# Altium PCB PCB1.PcbDoc
Units mil, origin at the board's own origin, x right, y up, seen from the top; angles counter-clockwise.
Board outline 2810 x 4080 mil, 2 copper layers (Top Layer, Bottom Layer); 54 components, 51 nets, 344 pads, 53 vias.
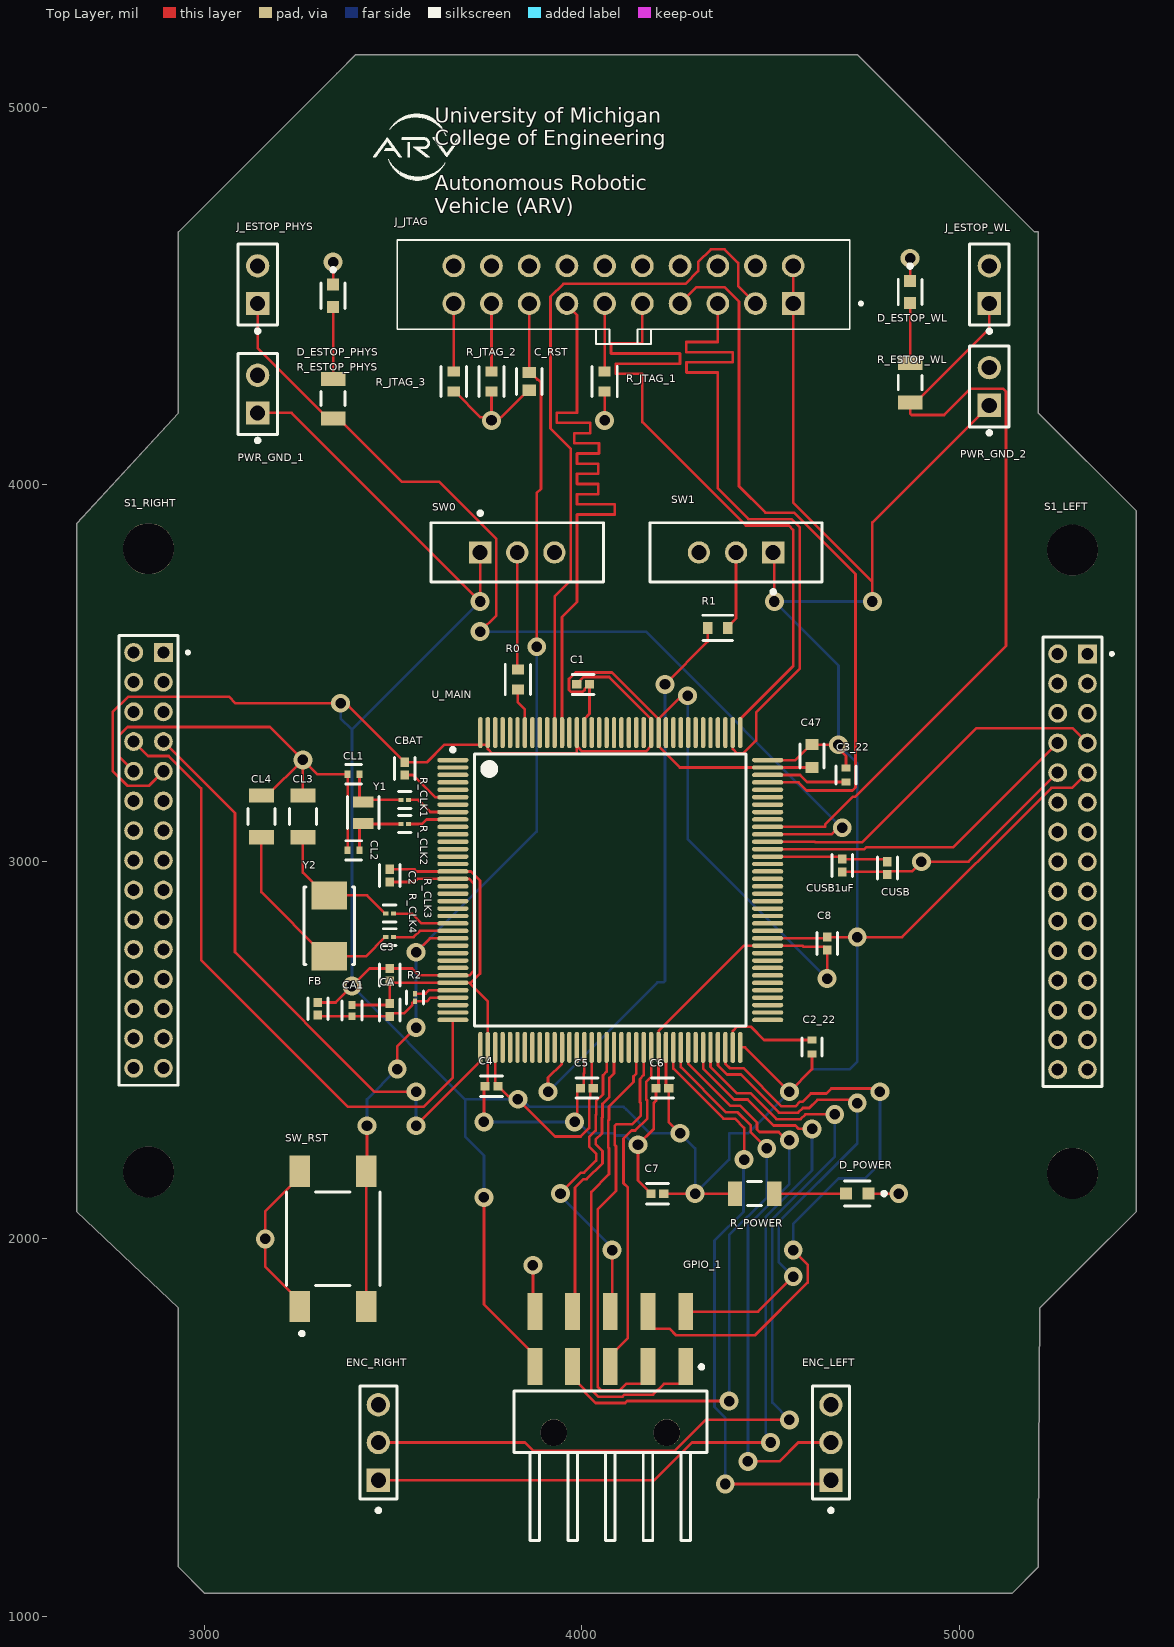
[diagram p0: Top Layer view]
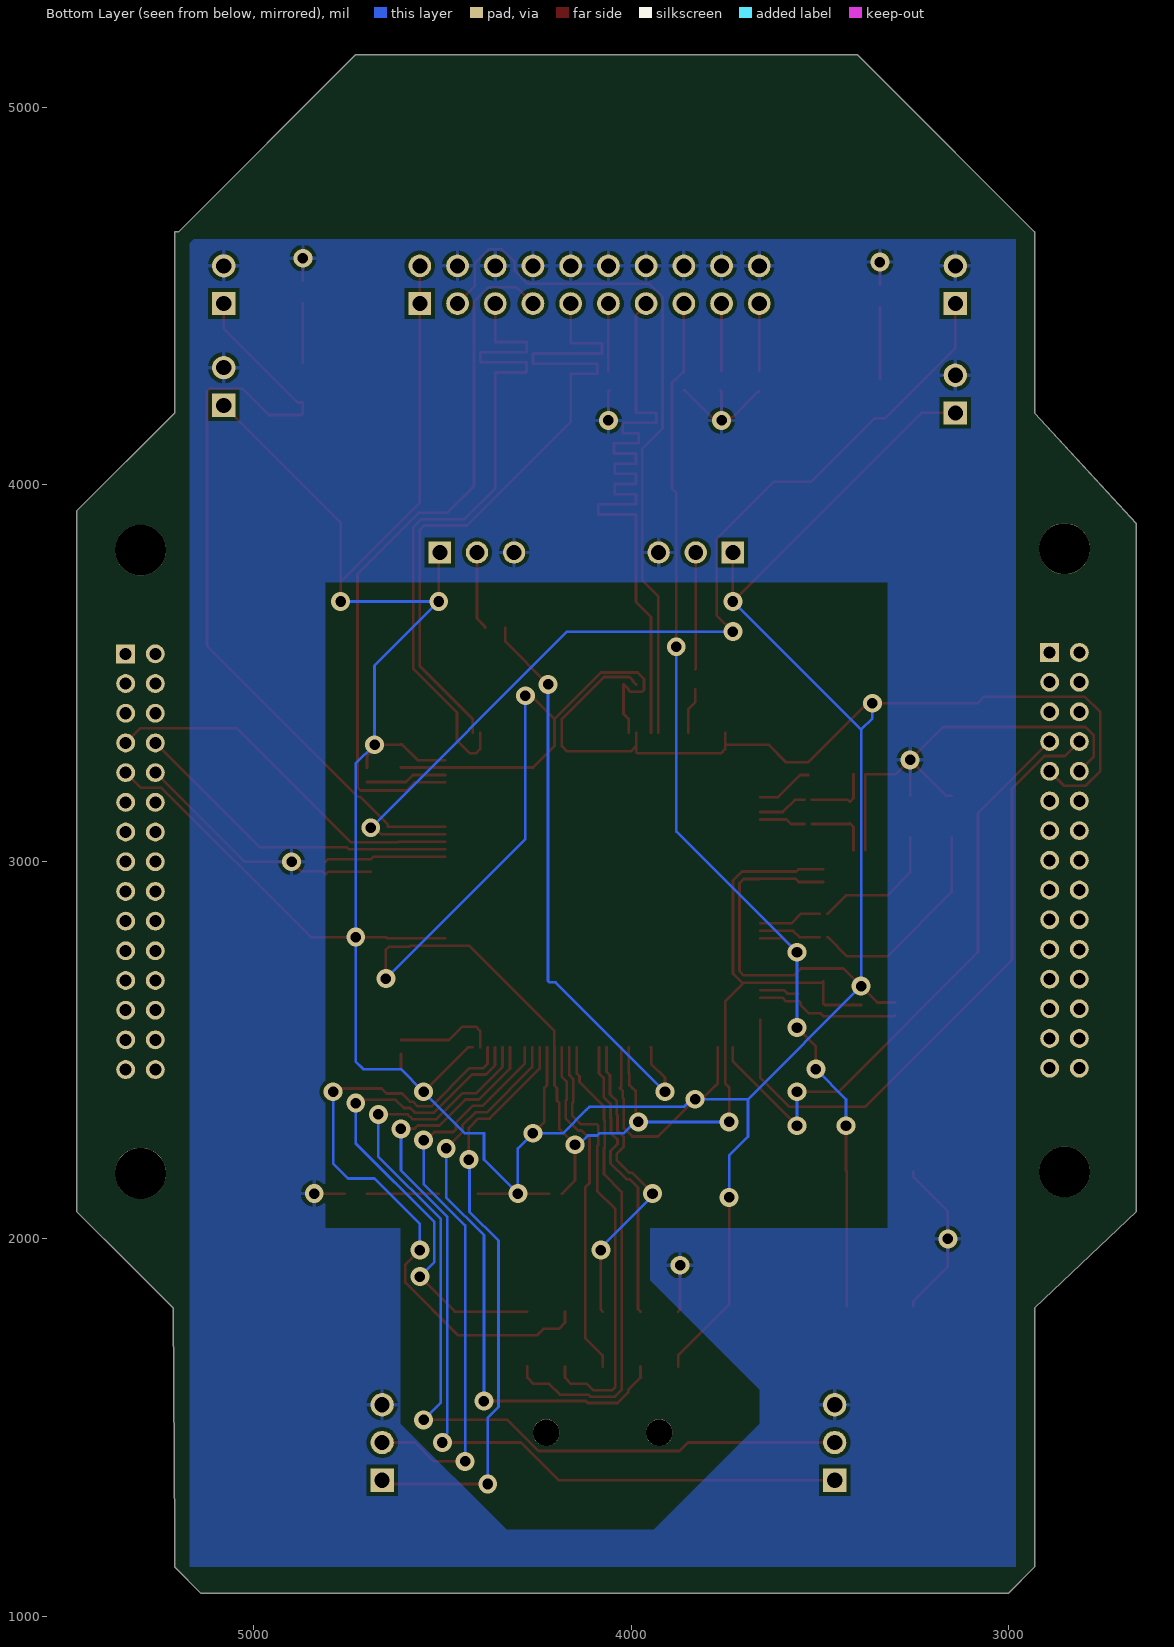
[diagram p1: Bottom Layer view, seen from below]
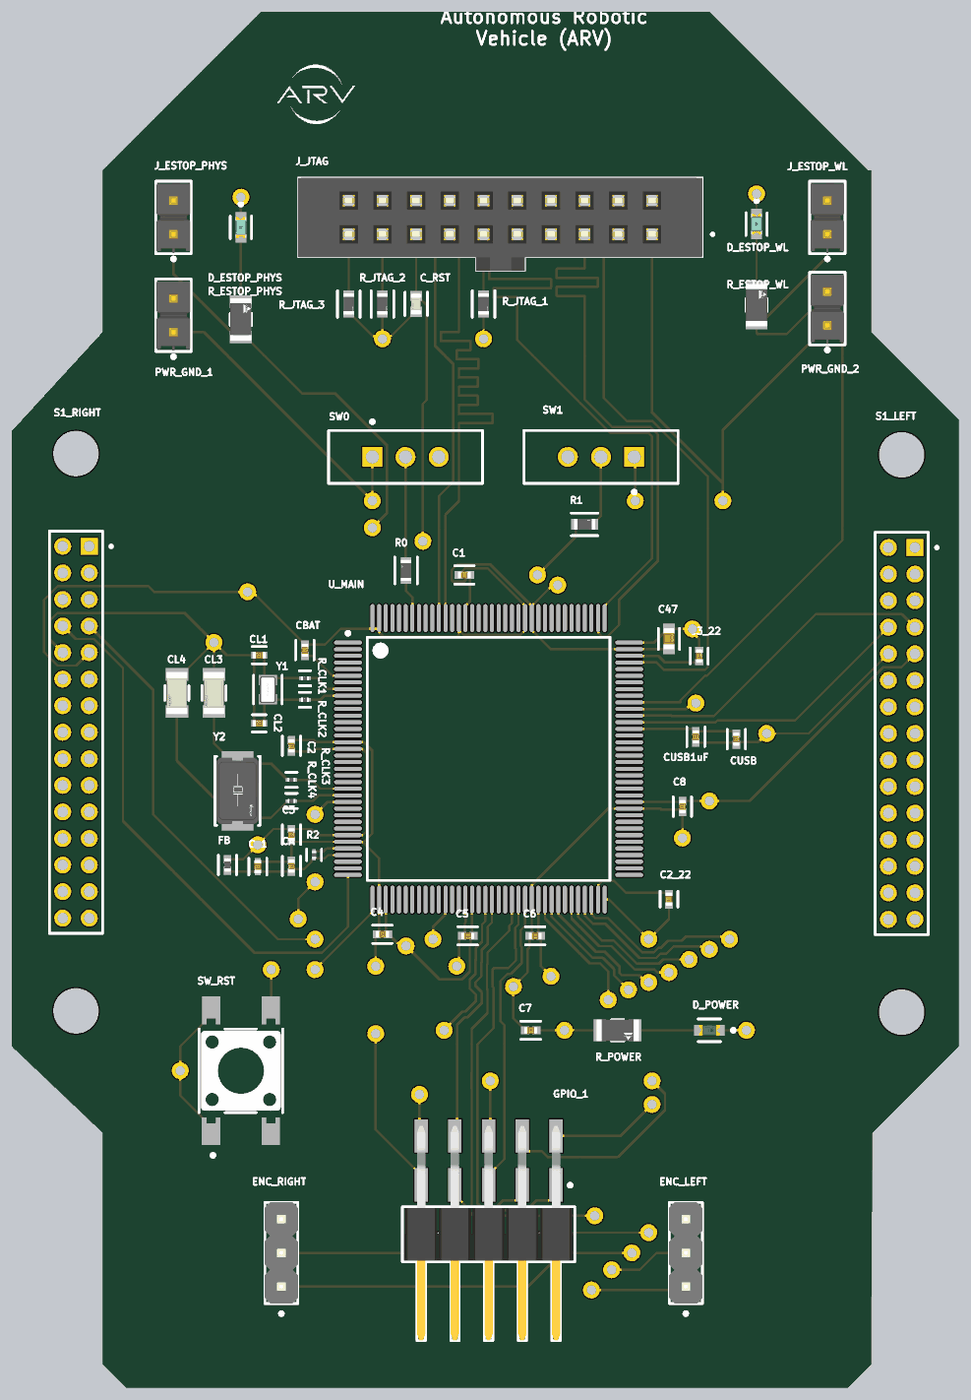
[diagram p2: 3D render of the assembled board from above, using the file's embedded part models]

## Layer stack, top to bottom
Top Solder: solder mask 0.4, Solder Resist, Dk 3.5
Top Layer: signal copper 1.4
Dielectric 1: dielectric 12.6, FR-4, Dk 4.8
Bottom Layer: signal copper 1.4
Bottom Solder: solder mask 0.4, Solder Resist, Dk 3.5

## Board outline
3350,5090 2930,4670 2930,4190 2660,3896.09 2660,2072.88 2930,1816.44 2930,1130 3000,1060 5140,1060 5210,1130 5210,1210 5213.56,1816.44 5325,1927.88 5470,2072.88 5470,3930 5210,4190 5210,4670 5200,4670 4730,5140 3400,5140

## Design rules (kind name [scope] priority, off if disabled: settings)
Clearance [All] p1: gap=5 ignorepadtopadclearanceinfootprint=FALSE except(0: Arc-Hole Track-Hole SMDPad-Hole THPad-Hole Via-Hole Fill-Hole Poly-Hole Region-Hole Text-Hole)
HoleSize [All] p1: absolutevalues=TRUE maxlimit=140 minlimit=1 maxpercent=80.000 minpercent=20.000
PolygonConnect [All] p1: connectstyle=Relief reliefconductorwidth=10 reliefentries=4 polygonreliefangle="90 Angle" airgapwidth=10
RoutingVias [All] p1: holewidth=28 width=50 viastyle="Through Hole" minholewidth=28 minwidth=50 maxholewidth=28 maxwidth=50
SolderMaskExpansion [All] p1: expansion=4 istentingtop=FALSE
Width [All] p1: maxlimit=10 minlimit=5 preferedwidth=7
29 further rules are at their usual default settings.

## Classes and differential pairs
component class U_UartCircuit: S1_LEFT S1_RIGHT
component class U_ResetCircuit: C_RST SW_RST
component class U_PowerCircuit: C1 C2 C2_22 C3 C3_22 C4 C5 C6 C7 C8 C47 CA CA1 CBAT CUSB CUSB1uF D_POWER FB R2 R_POWER
component class U_PeripheralCircuit: D_ESTOP_PHYS D_ESTOP_WL ENC_LEFT ENC_RIGHT GPIO_1 J_ESTOP_PHYS J_ESTOP_WL PWR_GND_1 PWR_GND_2 R_ESTOP_PHYS R_ESTOP_WL
component class U_DebugCircuit: J_JTAG R_JTAG_1 R_JTAG_2 R_JTAG_3
component class U_ClockCircuit: CL1 CL2 CL3 CL4 R_CLK1 R_CLK2 R_CLK3 R_CLK4 Y1 Y2
component class U_BootCircuit: R0 R1 SW0 SW1
component class STM32: U_MAIN

## Components (designator, comment, footprint, x,y, rotation, side; value= is the part's Value field where it differs from the comment)
C1 "GCM155L81E104KE02D" FP-GCM155-0_05-IPC_B 4003.13,3470 r180 top
C2 "GCM155L81E104KE02D" FP-GCM155-0_05-IPC_B 3490,2963.13 r270 top
C2_22 "GRM155R61E225ME15D" FP-GRM155-0_2-0_05-MFG 4610,2508.7 r270 top
C3 "GCM155L81E104KE02D" FP-GCM155-0_05-IPC_B 3490,2700 r90 top
C3_22 "GRM155R61E225ME15D" FP-GRM155-0_2-0_05-MFG 4700,3230 r90 top
C4 "GCM155L81E104KE02D" FP-GCM155-0_05-IPC_B 3760,2404.71 r0 top
C5 "GCM155L81E104KE02D" FP-GCM155-0_05-IPC_B 4013.13,2400 r0 top
C6 "GCM155L81E104KE02D" FP-GCM155-0_05-IPC_B 4213.13,2400 r0 top
C7 "GCM155L81E104KE02D" FP-GCM155-0_05-IPC_B 4200,2120 r0 top
C8 "GCM155L81E104KE02D" FP-GCM155-0_05-IPC_B 4650,2783.13 r90 top
C47 "GRM188R61C475KE11D" FP-GRM188-0_15-MFG 4610,3280.51 r90 top
C_RST "C0603C103K1RACTU" FP-C0603C-CF-MFG 3860,4273.62 r90 top value="10,000 pF"
CA "GCM155L81E104KE02D" FP-GCM155-0_05-IPC_B 3490,2606.87 r270 top
CA1 "GRM155R61C105KA12D" FP-GRM155-0_05-IPC_C 3390,2605.1 r270 top
CBAT "GCM155L81E104KE02D" FP-GCM155-0_05-IPC_B 3530,3246.87 r90 top
CL1 "GCM1555C1H6R8BA16D" FP-GCM155-0_05-MFG 3394.25,3232.18 r180 top
CL2 "GCM1555C1H6R8BA16D" FP-GCM155-0_05-MFG 3394.25,3030 r180 top
CL3 "C1206C180J5GACTU" FP-C1206C-EB-MFG 3260,3120 r90 top value="18 pF"
CL4 "C1206C180J5GACTU" FP-C1206C-EB-MFG 3150,3120 r90 top value="18 pF"
CUSB "GCM155L81E104KE02D" FP-GCM155-0_05-IPC_B 4810,2983.13 r90 top
CUSB1uF "GCM155L81E104KE02D" FP-GCM155-0_05-IPC_B 4690,2990 r90 top
D_ESTOP_PHYS "LTST-C191TBKT" FP-LTST-C191TBKT-MFG 3340,4500.47 r270 top
D_ESTOP_WL "LTST-C191TBKT" FP-LTST-C191TBKT-MFG 4870,4510.47 r270 top
D_POWER "LTST-C190GKT" FP-LTST-C190GKT-MFG 4730,2120 r180 top
ENC_LEFT "PR20203VBNN" FP-PR20203VBNN-MFG 4660,1460 r90 top
ENC_RIGHT "PR20203VBNN" FP-PR20203VBNN-MFG 3460,1460 r90 top
FB "BLM15AX601SN1D" FP-BLM15-0_05-IPC_B 3300,2610 r270 top
GPIO_1 "610110249121" 610110249121 4075,1515 r0 top
J_ESTOP_PHYS "TSW-102-07-L-S" FP-TSW-102-07-L-S-MFG 3140,4530 r90 top
J_ESTOP_WL "TSW-102-07-L-S" FP-TSW-102-07-L-S-MFG 5080,4530 r90 top
J_JTAG "SFH11-PBPC-D10-ST-BK" SULLINS_SFH11-PBPC-D10-ST-BK 4110,4530 r0 top
PWR_GND_1 "TSW-102-07-L-S" FP-TSW-102-07-L-S-MFG 3140,4240 r90 top
PWR_GND_2 "TSW-102-07-L-S" FP-TSW-102-07-L-S-MFG 5080,4260 r90 top
R0 "RC0603FR-0710KL" FP-RC0603-0_55-IPC_C 3830,3483.36 r90 top
R1 "RC0603FR-0710KL" FP-RC0603-0_55-IPC_C 4360,3620 r0 top
R2 "RMCF0201ZT0R00" FP-RMCF0201-IPC_C 3557.15,2640.01 r270 top
R_CLK1 "RMCF0201ZT0R00" FP-RMCF0201-IPC_C 3530.01,3163.83 r180 top
R_CLK2 "RMCF0201ZT0R00" FP-RMCF0201-IPC_C 3529.99,3100 r180 top
R_CLK3 "RMCF0201ZT0R00" FP-RMCF0201-IPC_C 3489.99,2862.37 r180 top
R_CLK4 "RMCF0201ZT0R00" FP-RMCF0201-IPC_C 3489.99,2800 r180 top
R_ESTOP_PHYS "CRCW1206220RJNEA" FP-CRCW1206-e3-IPC_C 3340,4227.79 r90 top
R_ESTOP_WL "CRCW1206220RJNEA" FP-CRCW1206-e3-IPC_C 4870,4270 r90 top
R_JTAG_1 "RC0603FR-0710KL" FP-RC0603-0_55-IPC_C 4060,4273.36 r270 top
R_JTAG_2 "RC0603FR-0710KL" FP-RC0603-0_55-IPC_C 3760,4273.36 r270 top
R_JTAG_3 "RC0603FR-0710KL" FP-RC0603-0_55-IPC_C 3660,4273.36 r270 top
R_POWER "CRCW1206220RJNEA" FP-CRCW1206-e3-IPC_C 4457.79,2120 r0 top
S1_LEFT "PTF-115-XX-X-D" SAMTEC_PTF-115-XX-X-D 5300.63,3000 r90 top (schematic designator S1_LEFT)
S1_RIGHT "PTF-115-XX-X-D" SAMTEC_PTF-115-XX-X-D 2850.63,3003.7 r90 top
SW0 "EG1218" ESWI-EG1218_V 3828.43,3820 r0 top
SW1 "EG1218" ESWI-EG1218_V 4408.43,3820 r180 top
SW_RST "FSM2JSMAA" FP-FSM2JSMAA-MFG 3340,2000 r180 top
U_MAIN "STM32F446ZET6" STM-LQFP144_M 4075,2925 r0 top
Y1 "ABS06-32.768KHZ-6-1-T" FP-ABS06-MFG 3420,3130 r270 top
Y2 "ABM3-8.000MHZ-D2Y-T" FP-ABM3-MFG 3330,2830 r270 top

## Footprints (in the part's own frame and the unit in brackets; to place one, negate y for a bottom-side part, rotate by r counter-clockwise, add the part's x,y. Pads: shape width x height; smd on the part's side, far side on the other; paste and mask are expansions set on the pad)
610110249121 [mm] "Pin Header, pitch 2.54 mm, SMD, Angled, dual row, 10p"
  rect 1x2.5 smd: 1(5.08,3.72) 2(5.08,7.42) 3(2.54,3.72) 4(2.54,7.42) 5(0,3.72) 6(0,7.42) 7(-2.54,3.72) 8(-2.54,7.42) 9(-5.08,3.72) 10(-5.08,7.42)
  round 1.8 hole 1.8 unplated: MH1(3.81,-0.73) MH2(-3.81,-0.73)
  silkscreen extent -6.5,-8 6.5,3.82, body extent -6.35,-8 6.35,8.16, height 5.1
ESWI-EG1218_V [mm] "THD, 3-Leads, Body 11.6x4mm, Pitch 2.5mm"
  rect 1.5x1.5 hole 1: 1(-2.5,0)
  round 1.5 hole 1: 2(0,0) 3(2.5,0)
  silkscreen extent -5.8,-2 5.8,2.77, body extent -5.8,-2 5.8,2, height 7.4
FP-ABM3-MFG [mm]
  rect 1.9x2.4 smd paste+0 mask+0: 1(-2.05,0) 2(2.05,0)
  silkscreen extent -2.6,-1.7 2.6,1.7, body extent -3.1,-1.8 3.1,1.8, height 0.25
FP-ABS06-MFG [mm]
  rect 0.75x1.4 smd paste+0 mask+0: 1(-0.725,0) 2(0.725,0)
  silkscreen extent -1.07,-1.07 1.07,1.07, body extent -1.2,-0.8 1.2,0.8, height 0.25
FP-BLM15-0_05-IPC_B [mil]
  rect 24.23x22.54 smd paste+0 mask+0: 1(-16.87,0) 2(16.87,0)
  silkscreen extent -29,-27 29,27, body extent -35,-17 35,17, height 10
FP-C0603C-CF-MFG [mm]
  rect 0.75x0.9 smd paste+0 mask+0: 1(-0.6,0) 2(0.6,0)
  silkscreen extent -0.87,-0.85 0.88,0.85, body extent -1.2,-0.6 1.2,0.6, height 0.25
FP-C1206C-EB-MFG [mm]
  rect 0.95x1.7 smd paste+0 mask+0: 1(-1.4,0) 2(1.4,0)
  silkscreen extent -0.55,-0.9 0.55,0.9, body extent -2,-1 2,1, height 0.25
FP-CRCW1206-e3-IPC_C [mil]
  rect 37.64x65.28 smd paste+0 mask+0: 1(-52.21,0) 2(52.21,0)
  silkscreen extent -19,-31 19,31, body extent -75,-38 75,38, height 10
FP-FSM2JSMAA-MFG [mm]
  rect 1.38x2.1 smd paste+0 mask+0: 1(2.25,4.55) 2(2.24,-4.55) 3(-2.24,4.55) 4(-2.24,-4.55)
  silkscreen extent -3.15,-3.15 3.15,6.5, body extent -3.25,-5.7 3.25,5.7, height 0.25
FP-GCM155-0_05-IPC_B [mil]
  rect 24.23x22.54 smd paste+0 mask+0: 1(-16.87,0) 2(16.87,0)
  silkscreen extent -29,-27 29,27, body extent -35,-17 35,17, height 10
FP-GCM155-0_05-MFG [mm]
  rect 0.4x0.5 smd paste+0 mask+0: 1(-0.4,0) 2(0.4,0)
  silkscreen extent -0.53,-0.65 0.53,0.65, body extent -0.7,-0.38 0.7,0.38, height 0.25
FP-GRM155-0_2-0_05-MFG [mm]
  rect 0.45x0.6 smd paste+0 mask+0: 1(-0.475,0) 2(0.475,0)
  silkscreen extent -0.61,-0.67 0.6,0.67, body extent -0.8,-0.45 0.8,0.45, height 0.25
FP-GRM155-0_05-IPC_C [mil]
  rect 20.29x18.6 smd paste+0 mask+0: 1(-14.9,0) 2(14.9,0)
  silkscreen extent -25,-27 25,27, body extent -29,-15 29,15, height 10
FP-GRM188-0_15-MFG [mm]
  rect 0.75x0.9 smd paste+0 mask+0: 1(-0.775,0) 2(0.775,0)
  silkscreen extent -0.8,-0.8 0.8,0.8, body extent -1.25,-0.58 1.25,0.58, height 0.25
FP-LTST-C190GKT-MFG [mm]
  rect 0.8x0.8 smd paste+0 mask+0: 1(-0.75,0) 2(0.75,0)
  silkscreen extent -1.92,-0.85 0.85,0.85, body extent -1.25,-0.55 1.25,0.55, height 0.25
FP-LTST-C191TBKT-MFG [mm]
  rect 0.8x0.8 smd paste+0 mask+0: 1(-0.75,0) 2(0.75,0)
  silkscreen extent -1.87,-0.8 0.85,0.8, body extent -1.25,-0.55 1.25,0.55, height 0.25
FP-PR20203VBNN-MFG [mm]
  rect 1.57x1.57 hole 1.02 paste-1000 mask+0: 1(-2.54,0)
  round 1.57 hole 1.02 paste-1000 mask+0: 2(0,0) 3(2.54,0)
  silkscreen extent -4.7,-1.25 3.81,1.25, body extent -3.91,-1.35 3.91,1.35, height 0.25
FP-RC0603-0_55-IPC_C [mil]
  rect 25.93x31.97 smd paste+0 mask+0: 1(-26.64,0) 2(26.64,0)
  silkscreen extent -40,-33 40,33, body extent -44,-22 44,22, height 10
FP-RMCF0201-IPC_C [mil]
  rect 13.94x10.34 smd paste+0 mask+0: 1(-10.01,0) 2(10.01,0)
  silkscreen extent -17,-22 17,22, body extent -21,-10 21,10, height 10
FP-TSW-102-07-L-S-MFG [mm]
  rect 1.57x1.57 hole 1.02 paste-1000 mask+0: 1(-1.27,0)
  round 1.57 hole 1.02 paste-1000 mask+0: 2(1.27,0)
  silkscreen extent -3.25,-1.34 2.73,1.34, body extent -2.83,-1.44 2.83,1.44, height 0.25
SAMTEC_PTF-115-XX-X-D [mm]
  rect 1.27x1.27 / inner round 1.27 / far side rect 1.27x1.27 hole 0.813: 01(14,-1)
  round 1.27 hole 0.813: 02(14,1) 03(12,-1) 04(12,1) 05(10,-1) 06(10,1) 07(8,-1) 08(8,1) 09(6,-1) 10(6,1) 11(4,-1) 12(4,1) 13(2,-1) 14(2,1) 15(0,-1) 16(0,1) 17(-2,-1) 18(-2,1) 19(-4,-1) 20(-4,1) 21(-6,-1) 22(-6,1) 23(-8,-1) 24(-8,1) 25(-10,-1) 26(-10,1) 27(-12,-1) 28(-12,1) 29(-14,-1) 30(-14,1)
  round 3.43 hole 3.43 unplated: ""(-20.985,0) ""(20.985,0)
  silkscreen extent -15.15,-2.75 15.15,2
STM-LQFP144_M [mm] "Thin QFP, 144-Leads, Body 20x20mm, Pitch 0.5mm, IPC Low Density"
  oval 2.1x0.3 smd: 1(-10.6,8.75) 2(-10.6,8.25) 3(-10.6,7.75) 4(-10.6,7.25) 5(-10.6,6.75) 6(-10.6,6.25) 7(-10.6,5.75) 8(-10.6,5.25) 9(-10.6,4.75) 10(-10.6,4.25) 11(-10.6,3.75) 12(-10.6,3.25) 13(-10.6,2.75) 14(-10.6,2.25) 15(-10.6,1.75) 16(-10.6,1.25) 17(-10.6,0.75) 18(-10.6,0.25) 19(-10.6,-0.25) 20(-10.6,-0.75) 21(-10.6,-1.25) 22(-10.6,-1.75) 23(-10.6,-2.25) 24(-10.6,-2.75) 25(-10.6,-3.25) 26(-10.6,-3.75) 27(-10.6,-4.25) 28(-10.6,-4.75) 29(-10.6,-5.25) 30(-10.6,-5.75) 31(-10.6,-6.25) 32(-10.6,-6.75) 33(-10.6,-7.25) 34(-10.6,-7.75) 35(-10.6,-8.25) 36(-10.6,-8.75) 73(10.6,-8.75) 74(10.6,-8.25) 75(10.6,-7.75) 76(10.6,-7.25) 77(10.6,-6.75) 78(10.6,-6.25) 79(10.6,-5.75) 80(10.6,-5.25) 81(10.6,-4.75) 82(10.6,-4.25) 83(10.6,-3.75) 84(10.6,-3.25) 85(10.6,-2.75) 86(10.6,-2.25) 87(10.6,-1.75) 88(10.6,-1.25) 89(10.6,-0.75) 90(10.6,-0.25) 91(10.6,0.25) 92(10.6,0.75) 93(10.6,1.25) 94(10.6,1.75) 95(10.6,2.25) 96(10.6,2.75) 97(10.6,3.25) 98(10.6,3.75) 99(10.6,4.25) 100(10.6,4.75) 101(10.6,5.25) 102(10.6,5.75) 103(10.6,6.25) 104(10.6,6.75) 105(10.6,7.25) 106(10.6,7.75) 107(10.6,8.25) 108(10.6,8.75)
  oval 0.3x2.1 smd: 37(-8.75,-10.6) 38(-8.25,-10.6) 39(-7.75,-10.6) 40(-7.25,-10.6) 41(-6.75,-10.6) 42(-6.25,-10.6) 43(-5.75,-10.6) 44(-5.25,-10.6) 45(-4.75,-10.6) 46(-4.25,-10.6) 47(-3.75,-10.6) 48(-3.25,-10.6) 49(-2.75,-10.6) 50(-2.25,-10.6) 51(-1.75,-10.6) 52(-1.25,-10.6) 53(-0.75,-10.6) 54(-0.25,-10.6) 55(0.25,-10.6) 56(0.75,-10.6) 57(1.25,-10.6) 58(1.75,-10.6) 59(2.25,-10.6) 60(2.75,-10.6) 61(3.25,-10.6) 62(3.75,-10.6) 63(4.25,-10.6) 64(4.75,-10.6) 65(5.25,-10.6) 66(5.75,-10.6) 67(6.25,-10.6) 68(6.75,-10.6) 69(7.25,-10.6) 70(7.75,-10.6) 71(8.25,-10.6) 72(8.75,-10.6) 109(8.75,10.6) 110(8.25,10.6) 111(7.75,10.6) 112(7.25,10.6) 113(6.75,10.6) 114(6.25,10.6) 115(5.75,10.6) 116(5.25,10.6) 117(4.75,10.6) 118(4.25,10.6) 119(3.75,10.6) 120(3.25,10.6) 121(2.75,10.6) 122(2.25,10.6) 123(1.75,10.6) 124(1.25,10.6) 125(0.75,10.6) 126(0.25,10.6) 127(-0.25,10.6) 128(-0.75,10.6) 129(-1.25,10.6) 130(-1.75,10.6) 131(-2.25,10.6) 132(-2.75,10.6) 133(-3.25,10.6) 134(-3.75,10.6) 135(-4.25,10.6) 136(-4.75,10.6) 137(-5.25,10.6) 138(-5.75,10.6) 139(-6.25,10.6) 140(-6.75,10.6) 141(-7.25,10.6) 142(-7.75,10.6) 143(-8.25,10.6) 144(-8.75,10.6)
  silkscreen extent -10.72,-9.15 9.15,9.57, body extent -10,-10 10,10, height 1.6
SULLINS_SFH11-PBPC-D10-ST-BK [mm]
  rect 1.53x1.53 / inner round 1.53 / far side rect 1.53x1.53 hole 1.02: 1(11.43,-1.27)
  round 1.53 hole 1.02: 2(11.43,1.27) 3(8.89,-1.27) 4(8.89,1.27) 5(6.35,-1.27) 6(6.35,1.27) 7(3.81,-1.27) 8(3.81,1.27) 9(1.27,-1.27) 10(1.27,1.27) 11(-1.27,-1.27) 12(-1.27,1.27) 13(-3.81,-1.27) 14(-3.81,1.27) 15(-6.35,-1.27) 16(-6.35,1.27) 17(-8.89,-1.27) 18(-8.89,1.27) 19(-11.43,-1.27) 20(-11.43,1.27)
  silkscreen extent -15.24,-4 16.09,3, body extent -15.24,-4.01 15.24,3, height 8.51

## Part data
C1 C2 C3 C4 C5 C6 C7 C8 CA CBAT CUSB CUSB1uF: library part CMP-06035-044163-1, "Ceramic Capacitor for Automotive 100nF ±10% 25VDC X8L 0402 Paper T/R"
C2_22 C3_22: library part CMP-06035-061317-1, "Chip Multilayer Ceramic Capacitors for General Purpose, 0402, 2.2uF, X5R, 15%, 20%, 25V", Capacitance=2.2uF, Case Code (Imperial)=0402, Case Code (Metric)=1005, Dielectric=X5R, Max Operating Temperature=85°C, Min Operating Temperature=-55°C, Package Quantity=10000, Tolerance=20%, Voltage Rating=25V, Case/Package=0402, Height=0.5mm, Length=0.039inch, Mount="Surface Mount", Packaging="Tape and Reel", Termination=SMD/SMT, Thickness=0.022inch, Voltage Rating (DC)=25V, Weight=0.000212oz, Width=0.02inch
C47: library part CMP-06035-007733-2, "Chip Multilayer Ceramic Capacitors for General Purpose, 0603, 4.7uF, X5R, 15%, 10%, 16V", Capacitance=4.7uF, Case Code (Imperial)=0603, Case Code (Metric)=1608, Dielectric=X5R, Max Operating Temperature=85°C, Min Operating Temperature=-55°C, Package Quantity=4000, Resistor Type=Ceramic, Tolerance=10%, Voltage Rating=16V, Case/Package=0603, Height=0.8mm, Lead Free="Lead Free", Length=0.063inch, Mount="Surface Mount", Packaging="Tape and Reel", RoHS Compliant=Yes, Series=GRM, Termination=SMD/SMT, Thickness=0.037inch, Voltage Rating (DC)=16V, Weight=0.000222oz, Width=0.031inch
C_RST: library part CMP-2006-03036-2, "CAP CER 10000PF 100V X7R 0603", Capacitance="10,000 pF", Manufacturer=KEMET, Package=C0603C-CF, Temperature="-55°C to +125°C", Temperature Characteristic=X7R, Temperature Coefficient=30ppm/°C, Temperature Range High=+125°C, Temperature Range Low=-55°C, Tolerance=0.1, Voltage Rating="100 V", Automotive=Yes, Automotive Grade="Grade 1", Category=Cap, ComponentLink2Description=Datasheet, ComponentLink2URL=https://api.kemet.com/component-edge/download/datasheet/C0603C100J5GACAUTO.pdf, Device Class L1="Passive Components", Device Class L2=Capacitors, Device Class L3="Ceramic Capacitors", Digikey Description="CAP CER 10000PF 100V X7R 0603", Height=0.87mm, Lead Free=Yes, Manufacturer Part Number=C0603C103K1RACTU, Material=Ceramic, Mouser Description="Multilayer Ceramic Capacitors MLCC - SMD/SMT 100volts 10000pF X7R 10%", Octopart=https://octopart.com/c0603c103k1ractu-kemet-134140, RoHS=TRUE
CA1: library part CMP-2008-04573-2, "Chip Multilayer Ceramic Capacitors for General Purpose, 0402, 1.0uF, X5R, 15%, 10%, 16V", Capacitance=1uF, Case Code (Imperial)=0402, Case Code (Metric)=1005, Dielectric=X5R, Max Operating Temperature=85°C, Min Operating Temperature=-55°C, Tolerance=10%, Voltage=16V, Case/Package=0402, Depth=0.5mm, Height=0.5mm, Lead Free="Lead Free", Length=1mm, Material=Ceramic, Mount="Surface Mount", Packaging="Tape and Reel", Radiation Hardening=No, REACH SVHC="No SVHC", Thickness=0.022inch, Voltage Rating=16V, Voltage Rating (DC)=16V, Width=0.02inch
CL1 CL2: library part CMP-06035-015550-1, "Ceramic Capacitor for Automotive 6.8pF ±0.1pF 50VDC C0G 0402 Paper T/R", Capacitance=6.8pF, Case/Package=0402, Max Operating Temperature=125°C, Min Operating Temperature=-55°C, Ratings=AEC-Q200, Voltage Rating=50V, Mount="Surface Mount", Packaging="Cut Tape"
CL3 CL4: library part CMP-1037-00893-2, "1206 C 18pF Ceramic Multilayer Capacitor; 50 VDC; +125degC; C0G Dielec; +/-5%", Capacitance="18 pF", Manufacturer=KEMET, Package=C1206C-EB, Temperature="-55°C to +150°C", Temperature Characteristic=C0G, Temperature Coefficient=15%, Temperature Range High=+150°C, Temperature Range Low=-55°C, Tolerance=0.05, Voltage Rating="50 V", Automotive=Yes, Automotive Grade="Grade 0", Category=Cap, ComponentLink2Description=Datasheet, ComponentLink2URL=https://content.kemet.com/datasheets/KEM_C1007_X8R_ULTRA_150C_SMD.pdf, Device Class L1="Passive Components", Device Class L2=Capacitors, Device Class L3="Ceramic Capacitors", Digikey Description="1206 C 18pF Ceramic Multilayer Capacitor; 50 VDC; +125degC; C0G Dielec; +/-5%", Height=0.88mm, Ipc Land Pattern Name=CAPC320160X78, Lead Free=Yes, Manufacturer Part Number=C1206C180J5GACTU, Material=Ceramic, Mouser Description="1206 C 18pF Ceramic Multilayer Capacitor; 50 VDC; +125degC; C0G Dielec; +/-5%", Octopart=https://octopart.com/c1206c180j5gactu-kemet-90945, RoHS=TRUE
D_ESTOP_PHYS D_ESTOP_WL: library part CMP-22017-000008-1, "LED BLUE CLEAR CHIP SMD", Case Code (Imperial)=0603, Case Code (Metric)=1608, Color=Blue, Forward Current=20mA, Forward Voltage=3.8V, Lens Color=Colorless, Max Operating Temperature=80°C, Max Power Dissipation=75mW, Min Operating Temperature=-20°C, Package Quantity=1, Power Dissipation=76mW, Reverse Voltage=5V, Case/Package=0603, Depth=1.6mm, Dominant Wavelength=475nm, Height=0.55mm, Illumination Color=Blue, Lead Free="Lead Free", Length=0.8mm, Lens Style=Diffused, Lens Transparency=Clear, Luminous Intensity=180mcd, Mount="Surface Mount", Number of Elements=1, Number of LEDs=1, Number of Pins=2, Packaging="Tape and Reel", Radiation Hardening=No, Test Current=20mA, Viewing Angle=130°, Wavelength=468nm, Width=0.8mm
D_POWER: library part CMP-22017-000005-2, "LED GREEN CLEAR CHIP SMD", Case Code (Imperial)=0603, Case Code (Metric)=1608, Color=Green, Forward Current=30mA, Forward Voltage=2.1V, Lens Color=Colorless, Max Operating Temperature=85°C, Min Operating Temperature=-55°C, Package Quantity=1, Power Dissipation=100mW, Reverse Voltage=5V, Test Current=10mA, Voltage=2V, Case/Package=0603, Depth=0.8mm, Dominant Wavelength=569nm, Height=0.8mm, Illumination Color=Green, Lead Free="Lead Free", Length=1.6mm, Lens Style=Clear, Lens Transparency=Clear, Luminous Intensity=6mcd, Mount="Surface Mount", Number of Elements=1, Number of LEDs=1, Number of Pins=2, Packaging="Tape and Reel", Power Rating=100mW, Radiation Hardening=No, Viewing Angle=130°, Wavelength=565nm, Width=0.8mm
ENC_LEFT ENC_RIGHT: library part CMP-77940-000002-1, "CONN HEADER VERT 3POS 2.54MM", Current Rating=3A, Manufacturer="Metz Connect", Temperature="-40°C to +105°C", Temperature Range High=+105°C, Temperature Range Low=-40°C, Automotive=No, Category=Conn, ComponentLink2Description=Datasheet, ComponentLink2URL=https://datasheet.octopart.com/PR20203VBNN-Metz-Connect-datasheet-101610322.pdf, Conn Gender=Male, Conn Orientation=Straight, Contact Material=Gold,Nickel, Device Class L1=Connectors, Device Class L2="Headers and Wire Housings", Device Class L3=unset, Digikey Description="CONN HEADER VERT 3POS 2.54MM", Height=8.6mm, Lead Free=Yes, Manufacturer Part Number=PR20203VBNN, Number of Contacts=3, Number Of Rows=1, Octopart=https://octopart.com/pr20203vbnn-metz+connect-87667116, Package=PR20203VBNN, Pitch=2.54mm, RoHS=TRUE
FB: library part CMP-0686-00246-4, "Chip Ferrite Bead, 0402, 600Ω @ 100MHz, 0.34Ω, 25%, 500mA", Case Code (Imperial)=0402, Case Code (Metric)=1005, Current Rating=500mA, DC Resistance (DCR)=340mR, Max Operating Temperature=125°C, Min Operating Temperature=-55°C, Package Quantity=1, Test Frequency=100MHz, Tolerance=25%, Case/Package=0402, Core Material=Ferrite, DC Resistance-Max=340mR, Depth=0.5mm, Height=0.5mm, Impedance=600R, Lead Free="Lead Free", Length=1mm, Material=Steel, Max Current Rating=500mA, Max DC Current=500mA, Number of Circuits=1, Number of Lines=1, Number of Pins=2, Packaging="Tape and Reel", REACH SVHC="No SVHC", RoHS Compliant=Yes, Series=BLM15AX_SN, Termination=SMD/SMT, Width=0.5mm
GPIO_1: library part CMP-1502-01148-3, Color=Black, Contact Resistance=20mΩ, Current Rating=3A, Operating Supply Voltage=250V, Connector Type="Male Pin", Contact Mating Length=5.9944mm, Contact Plating=Gold, Gender=Male, Lead Pitch=2.54mm, Mount="Surface Mount", NexarPartId=52645093, Number of Contacts=10, Number of Pins=10, Number of Positions=10, Number Of Rows=2, Packaging="Tape and Reel", Pitch=2.54mm, REACH SVHC=Unknown, RoHS=Compliant, Row Spacing=2.54mm, Termination=Solder
J_ESTOP_PHYS J_ESTOP_WL PWR_GND_1 PWR_GND_2: library part CMP-02766-001428-1, "CONN HEADER VERT 2POS 2.54MM", Color=Black, Current Rating=7.6A, Max Operating Temperature=125°C, Max Voltage Rating (AC)=550V, Min Operating Temperature=-55°C, Package Quantity=1, Connector Type="Male Pin", Contact Material=Bronze, Contact Mating Length=0.23inch, Contact Plating=Gold, Contact Type="Male Pin", Depth=2.54mm, Gender=Male, Housing Color=Black, Housing Material=Polyester, Lead Free="Lead Free", Length=5.08mm, Max Current Rating=7.6A, Mount="Through Hole", Number of Contacts=2, Number of Positions=2, Number Of Rows=1, Orientation=Straight, Packaging=Bulk, Pitch=2.54mm, Radiation Hardening=No, REACH SVHC="No SVHC", RoHS Compliant=Yes, Series=TSW, Termination=Solder, Voltage Rating=550V, Width=2.54mm
J_JTAG: "20 Position Header Connector 0.100 (2.54mm) Through Hole Gold", Package=None, Availability="In Stock", Check_prices=https://www.snapeda.com/parts/SFH11-PBPC-D10-ST-BK/Sullins+Connector+Solutions/view-part/?ref=eda, MF="Sullins Connector", MP=SFH11-PBPC-D10-ST-BK, Price=None, Purchase-URL=https://pricing.snapeda.com/search?q=SFH11-PBPC-D10-ST-BK&ref=eda, SnapEDA_Link=https://www.snapeda.com/parts/SFH11-PBPC-D10-ST-BK/Sullins+Connector+Solutions/view-part/?ref=snap
R0 R1 R_JTAG_1 R_JTAG_2 R_JTAG_3: library part CMP-2100-03664-2, "RES 10K OHM 1% 1/10W 0603", Case Code (Imperial)=0603, Case Code (Metric)=1608, Max Operating Temperature=155°C, Max Power Dissipation=100mW, Min Operating Temperature=-55°C, Resistance=10kR, Resistance Tolerance=1%, Resistor Type="Thick Film", Temperature Coefficient=100ppm/°C, Voltage Rating=75V, Voltage Rating (DC)=50V, Case/Package=0603, Construction=Rectangular, Depth=0.8mm, Features="Moisture Resistant", Height=0.45mm, Lead Free="Lead Free", Lead Pitch=0.3mm, Length=1.6mm, Military Standard=Not, Number of Pins=2, Number of Terminations=2, Packaging="Tape and Reel", Power Rating=100mW, RoHS Compliant=Yes, Series=RC, Size Code=0603, Termination=SMD/SMT, Tolerance=1%, Weight=7.1E-05oz, Width=0.8mm
R2 R_CLK1 R_CLK2 R_CLK3 R_CLK4: library part CMP-26527-001890-1, "0Ω ±0 0.05W 0201 Thick Film Chip Resistor AEC-Q200 compliant", Case Code (Imperial)=0201, Case Code (Metric)=0603, Max Operating Temperature=125°C, Max Power Dissipation=50mW, Min Operating Temperature=-55°C, Package Quantity=10000, Resistance=0R, Resistor Type="Thick Film", Case/Package=0201, Contact Plating=Tin, Height=0.009inch, Height - Seated (Max)=0.01inch, Lead Free="Lead Free", Length=0.024inch, Mount="Surface Mount", Number of Terminations=2, Packaging="Tape and Reel", Power Rating=50mW, Radiation Hardening=No, RoHS Compliant=Yes, Series=RMCF, Width=0.012inch
R_ESTOP_PHYS R_ESTOP_WL R_POWER: library part CMP-1014-00058-3, "RES Thick Film, 220Ω, 5%, 0.25W, 200ppm/°C, 1206", Case Code (Imperial)=1206, Case Code (Metric)=3216, Max Operating Temperature=155°C, Max Power Dissipation=250mW, Min Operating Temperature=-55°C, Package Quantity=5000, Resistance=220R, Temperature Coefficient=200ppm/°C, Tolerance=5%, Voltage Rating=200V, Case/Package=1206, Composition="Thick Film", Contact Plating=Tin, Depth=1.6mm, Features="Automotive AEC-Q200", Height=0.55mm, Lead Free="Lead Free", Length=3.2mm, Military Standard=Not, Number of Terminations=2, Packaging="Tape and Reel", Power Rating=250mW, Radiation Hardening=No, Termination=SMD/SMT, Voltage Rating (DC)=200V, Weight=0.000353oz, Width=0.063inch
S1_LEFT S1_RIGHT: "Headers & Wire Housings 2.00 mm Press-Fit Socket Strip", Package=None, Availability=Unavailable, MF=Samtec, MP=PTF-115-XX-X-D, Price=None
SW0 SW1: library part CMP-1696-00002-1, "Slide Switch, 500 V, -20 to 70 degC, 3-Pin THD, RoHS", Case\Package=SOT-23-5, Dropout Voltage="300 mV", Max Input Voltage="8 V", Max Operating Temperature="85 degC", Max Ouput Current="150 mA", Max Power Dissipation="250 mW", Min Input Voltage="4.3 V", Min Operating Temperature="-40 degC", Nominal Output Voltage="3.3 V", Package Quantity=3000, ComponentLink1Description="Manufacturer URL", ComponentLink1URL=http://www.e-switch.ch/en/, ComponentLink2Description=Datasheet, ComponentLink2URL=https://www.e-switch.com/system/asset/product_line/data_sheet/119/EG.pdf, DatasheetVersion=Oct-15, Height="1.3 mm", Length="3 mm", Mount="Surface Mount", Output Current="150 mA", Output Voltage="3.3 V", Outputs=1, PackageDescription="3-Pin Through Hole Device, Body 11.6 x 4 mm, Pitch 2.5 mm", PackageReference=EG1218, Packaging="Tape and Reel", Pins=5, Power Rating="250 mW", Radiation Hardening=No, REACH SVHC="No SVHC", RoHSCompliant=true, Width="1.8 mm"
SW_RST: library part CMP-03402-000003-1, "SWITCH TACTILE SPST-NO 0.05A 24V", Contact Current Rating=50mA, Contact Resistance=100mΩ, Manufacturer="TE Connectivity", Operating Force=260gf, Package=0, Temperature="-35°C to +85°C", Temperature Range High=+85°C, Temperature Range Low=-35°C, Voltage Rating Dc=24V, Automotive=No, Category=Switch, ComponentLink2Description=Datasheet, ComponentLink2URL=https://www.te.com/commerce/DocumentDelivery/DDEController?Action=showdoc&DocId=Customer+Drawing%7F2-1437565-7%7FV%7Fpdf%7FEnglish%7FENG_CD_2-1437565-7_V.pdf%7F2-1437565-8, Device Class L1=Electromechanical, Device Class L2=Switches, Device Class L3="Pushbutton Switches", Digikey Description="SWITCH TACTILE SPST-NO 0.05A 24V", Electromechanical Life=100000Cycles, Height=4.59mm, Lead Free=Yes, Manufacturer Part Number=FSM2JSMAA, Mount="Surface Mount", Mouser Description="Tactile Switches TACTILE 260G FORCE S", Octopart=https://octopart.com/fsm2jsmaa-te+connectivity-41720620, RoHS=TRUE, Standoff Height=0.05mm, Throw Configuration=SPST-NO
U_MAIN: library part CMP-0243-00226-1, "ARM Cortex-M4 32-bit MCU+FPU, 512 KB Flash, 128 KB Internal RAM, 114 I/Os, 144-Pin LQFP, -40 to 85 degC, Tray", I/Os (High Current)=114, Operating Frequency(F) (Processor speed) (MHz)=180, Package Description=LQFP144, Package Reference="144-Pin Low Profile Quad Flat Package, Body 20 x 20 mm, Pitch 0.5 mm", Supply Voltage(Vcc) min (V)=1.7, ComponentLink1Description="Manufacturer URL", ComponentLink1URL=http://www.st.com/, ComponentLink2Description=Datasheet, ComponentLink2URL=http://www.st.com/st-web-ui/static/active/en/resource/technical/document/datasheet/DM00141306.pdf, Core="ARM Cortex-M4", D/A Converter=2, DatasheetVersion="Rev. 6", FLASH Size (Prog) (kB)=512, Internal RAM Size (kB)=128, Mounting Technology="Surface Mount", Packing=Tray
Y1: library part CMP-27762-015779-1, "Crystal 32.768kHz ±10ppm (Tol) 6pF FUND 90kΩ 2-Pin Mini-CSMD T/R", Case/Package=SMD/SMT, ESR (Equivalent Series Resistance)=90kR, Frequency=32.768kHz, Frequency Tolerance=10ppm, Load Capacitance=6pF, Max Operating Temperature=85°C, Min Operating Temperature=-40°C, Mount="Surface Mount", Packaging="Tape and Reel", RoHS Compliant=Yes, Series=ABS06
Y2: library part CMP-2000-05033-2, "Crystal 8MHz ±20ppm 18pF SMD-2 5mm x 3.2mm", Case/Package=CSMD, ESR (Equivalent Series Resistance)=140R, Frequency=8MHz, Frequency Stability=30ppm, Frequency Tolerance=20ppm, Load Capacitance=18pF, Max Operating Temperature=85°C, Min Operating Temperature=-40°C, Package Quantity=1000, Resistor Type=Ceramic, Series Resistance=500R, Depth=3.2mm, Height=0.051inch, Lead Free="Lead Free", Length=5mm, Mount="Surface Mount", Number of Pins=2, Packaging="Tape and Reel", Radiation Hardening=No, RoHS Compliant=Yes, Termination=SMD/SMT, Tolerance=20ppm, Width=3.2mm

## Via types
v1: diameter 50, hole 28, Top Layer to Bottom Layer, 53 vias

## Nets (pads, with @x,y where several pads share a name; then routed paths per layer and width w, separated by ;. In a path a pad name is that pad's centre, name@x,y a point inside that pad or via, vN(x,y) a via of type N, cw(c..) or ccw(c..) an arc to the next point about the centre after c; other vN are vias at no path point)
GND: C_RST.1 CL1.2 CL2.2 CL3.2 CL4.2 CUSB1uF.1 CUSB.1 D_ESTOP_PHYS.1 D_ESTOP_WL.1 D_POWER.1 ENC_LEFT.3 ENC_RIGHT.3 GPIO_1.10 J_ESTOP_PHYS.2 J_ESTOP_WL.2 J_JTAG.4 J_JTAG.6 J_JTAG.8 J_JTAG.10 J_JTAG.12 J_JTAG.14 J_JTAG.16 J_JTAG.18 J_JTAG.20 PWR_GND_1.2 PWR_GND_2.2 R_JTAG_1.2 R_JTAG_2.2 R_JTAG_3.2 S1_LEFT.10 S1_RIGHT.10 SW0.3 SW1.3 SW_RST.1 SW_RST.2 | length 3097.2
  Top Layer w7: S1_RIGHT.10 2772.76,3278.42 2772.76,3334.61 2795.31,3357.16 3172.84,3357.16 v1(3260,3270) ; CL4.2 3164.76,3175.12 3259.65,3270 v1(3260,3270) ; SW_RST.1 3251.42,1835.04 3160,1926.46 v1(3160,2000) 3160,2073.15 3251.81,2164.96 SW_RST.2 ; CL3.2 v1(3260,3270) ; D_ESTOP_PHYS.1 v1(3340,4590) ; CL2.2 CL1.2 3297.82,3232.18 v1(3260,3270) ; R_JTAG_3.2 3663.02,4246.72 3731.51,4178.23 3751.77,4178.23 v1(3760,4170) ; R_JTAG_2.2@3763.28,4250 R_JTAG_2.2 v1(3760,4170) ; C_RST.1 3857.05,4250 3785.27,4178.23 3768.23,4178.23 v1(3760,4170) ; v1(3870,1930) 3870,1812.13 GPIO_1.10 ; R_JTAG_1.2@4056.72,4250 R_JTAG_1.2 v1(4060,4170) ; CUSB1uF.1 4803.13,2973.13 CUSB.1 4810,2966.62 4817.77,2974.39 4874.39,2974.39 v1(4900,3000) 5025.04,3000 S1_LEFT.10 ; D_POWER.1 v1(4840,2120) ; D_ESTOP_WL.1 v1(4870,4600)
NetS1_LEFT_07: S1_LEFT.07 U_MAIN.97 | length 989.3
  Top Layer w7: U_MAIN.97 4617.1,3052.95 4618.55,3051.5 4743.01,3051.5 5044.97,3353.46 5301.5,3353.46 S1_LEFT.07
NetS1_LEFT_08: S1_LEFT.08 U_MAIN.96 | length 885.6
  Top Layer w7: U_MAIN.96 4748.81,3033.27 4754.05,3038.5 4984.8,3038.5 S1_LEFT.08
NetC1_1: C1.1 C2.1 C3.1 C4.1 C5.1 C6.1 C7.1 C8.1 C47.1 CA1.1 CA.1 U_MAIN.16 U_MAIN.31 U_MAIN.38 U_MAIN.51 U_MAIN.61 U_MAIN.83 U_MAIN.107 U_MAIN.120 U_MAIN.130 | length 5070.1
  Top Layer w7: CA1.1 3486.25,2620 CA.1 C3.1 3494.19,2678.94 U_MAIN.31 3657.96,2678.66 3701.15,2678.66 ; C2.1 3556.14,2980 3561.93,2974.21 U_MAIN.16 3657.96,2973.93 3705.5,2973.93 3729.52,2949.92 3729.52,2703.23 3704.95,2678.66 3701.15,2678.66 ; v1(3740,2310) 3740,2401.58 C4.1 3750.2,2411.77 U_MAIN.38 3750.2,2629.61 3701.15,2678.66 ; v1(3980.5,2310) 3987.64,2317.14 3987.64,2392.23 3989.16,2393.75 3990,2393.75 C5.1 3996.62,2400 4004.39,2407.77 4004.39,2438.04 4006.1,2439.75 U_MAIN.51 ; U_MAIN.130 4006.1,3378.44 4020,3392.34 C1.1 4019.16,3470 4006.87,3457.71 4006.87,3455.21 4001.89,3450.23 3970.62,3450.23 3965.64,3455.21 3965.64,3484.79 3982.62,3501.77 4079.63,3501.77 U_MAIN.120@4202.95,3378.44 ; C7.1 4182.28,2120 4174.51,2127.77 4174.51,2128.61 4148.5,2154.63 v1(4148.5,2249.56) 4190.24,2291.3 4190.24,2360.24 4196.25,2366.25 C6.1 4202.95,2406.7 U_MAIN.61 4203.23,2507.96 4203.23,2551.15 4429.45,2777.36 U_MAIN.83 4584.62,2777.36 4587.59,2774.39 4642.23,2774.39 4650,2766.62 C8.1 v1(4650,2690) ; v1(4280,3440) 4271.77,3431.77 4256.28,3431.77 U_MAIN.120@4202.95,3378.44 ; C47.1 4609.8,3249.8 U_MAIN.107 4259.35,3249.8 4202.95,3306.2 U_MAIN.120 U_MAIN.120@4202.95,3378.44
  Bottom Layer w7: v1(3740,2310) 3990,2310 4020,2280 4083.77,2280 4089.77,2273.99 4114.54,2273.99 4138.97,2249.56 v1(4148.5,2249.56) ; v1(4280,3440) 4280,3060 v1(4650,2690)
NetC2_22_1: C2_22.1 U_MAIN.71 | length 272.8
  Top Layer w7: U_MAIN.71 4400.08,2507.96 4400.08,2551.15 4411.45,2562.52 4447.44,2562.52 4482.56,2527.4 C2_22.1
NetC3_22_1: C3_22.1 U_MAIN.106 | length 215.5
  Top Layer w7: U_MAIN.106 4492.44,3230 4578.43,3230 4597.13,3211.3 C3_22.1
NetC_RST_2: C_RST.2 J_JTAG.15 SW_RST.3 SW_RST.4 U_MAIN.25 | length 2979.4
  Top Layer w7: SW_RST.3 SW_RST.4 3430,2180.94 v1(3430,2300) ; v1(3510,2450) 3510,2510 v1(3560,2560) ; v1(3560,2760) 3596.77,2796.77 3657.4,2796.77 U_MAIN.25 ; J_JTAG.15 C_RST.2 3862.95,4297.24 3881.93,4278.26 3883.31,4278.26 3891.22,4270.36 3891.22,3988.81 3880,3977.59 v1(3880,3570)
  Bottom Layer w7: v1(3430,2300) 3430,2370 v1(3510,2450) ; v1(3560,2560) v1(3560,2760) 3880,3080 v1(3880,3570)
NetCA1_2: CA1.2 CA.2 FB.2 R2.2 U_MAIN.33 | length 382.6
  Top Layer w7: FB.2 3302.94,2590.19 CA1.2 CA.2@3489.81,2590.19 ; CA.2 3490,2590.36 3497.77,2598.13 3528.13,2598.13 3550,2620 3550,2625.45 3554.1,2629.55 3572.61,2629.55 3573.05,2630 3588.96,2630 3598.53,2639.57 U_MAIN.33
NetCBAT_1: CBAT.1 U_MAIN.6 | length 152.1
  Top Layer w7: CBAT.1 3551.77,3230 3610.43,3171.34 3657.4,3171.34 U_MAIN.6
NetCL1_1: CL1.1 R_CLK1.2 Y1.1 | length 180
  Top Layer w7: CL1.1 3410,3168.54 Y1.1 3425.29,3163.83 R_CLK1.2
NetCL2_1: CL2.1 R_CLK2.2 Y1.2 | length 176.2
  Top Layer w7: CL2.1 3410,3091.46 Y1.2 3421.46,3100 R_CLK2.2
NetCL3_1: CL3.1 R_CLK3.2 Y2.1 | length 358.9
  Top Layer w7: CL3.1 3260,2970.87 3320.16,2910.71 Y2.1 3429.84,2910.71 3478.18,2862.37 R_CLK3.2
NetCL4_1: CL4.1 R_CLK4.2 Y2.2 | length 566.9
  Top Layer w7: CL4.1 3150,2919.45 3320.16,2749.29 Y2.2 3427.47,2749.29 3478.18,2800 R_CLK4.2
NetCUSB1uF_2: CUSB1uF.2 CUSB.2 U_MAIN.95 | length 323.3
  Top Layer w7: U_MAIN.95 4683.29,3013.58 CUSB1uF.2 4803.13,3006.87 CUSB.2
NetD_ESTOP_PHYS_2: D_ESTOP_PHYS.2 R_ESTOP_PHYS.2 | length 190.9
  Top Layer w7: R_ESTOP_PHYS.2 D_ESTOP_PHYS.2
NetD_ESTOP_WL_2: D_ESTOP_WL.2 R_ESTOP_WL.2 | length 158.7
  Top Layer w7: R_ESTOP_WL.2 D_ESTOP_WL.2
NetD_POWER_2: D_POWER.2 R_POWER.2 | length 190.5
  Top Layer w7: R_POWER.2 D_POWER.2
NetENC_LEFT_1: ENC_LEFT.1 U_MAIN.63 | length 1581.8
  Top Layer w7: U_MAIN.63 4242.32,2451.48 4375.3,2318.5 4405.95,2318.5 4430,2294.45 v1(4430,2210) ; v1(4380,1350) 4650,1350 ENC_LEFT.1
  Bottom Layer w7: v1(4380,1350) 4380,1525.55 4351.5,1554.05 4351.5,1995.21 4428.15,2071.85 4428.15,2208.15 v1(4430,2210)
NetENC_LEFT_2: ENC_LEFT.2 U_MAIN.65 | length 1544.5
  Top Layer w7: U_MAIN.65 4281.97,2507.4 4281.97,2464.21 4393.68,2352.5 4420.03,2352.5 4464,2308.53 4464,2290.04 4470.54,2283.5 4521.3,2283.5 4542.8,2262 v1(4550,2262) ; v1(4440,1410) 4523.4,1410 4573.4,1460 ENC_LEFT.2
  Bottom Layer w7: v1(4440,1410) 4440,2035.62 4550,2145.62 v1(4550,2262)
NetENC_RIGHT_1: ENC_RIGHT.1 U_MAIN.67 | length 2380.3
  Top Layer w7: ENC_RIGHT.1 4191.98,1360 4291.98,1460 v1(4500,1460) ; U_MAIN.67 4321.06,2451.42 4402.98,2369.5 4439.4,2369.5 4508.4,2300.5 4565.95,2300.5 4574.5,2291.95 4609.55,2291.95 v1(4610,2291.5)
  Bottom Layer w7: v1(4500,1460) 4500,1471.64 4487.5,1484.14 4487.5,2059.08 4610,2181.58 v1(4610,2291.5)
NetENC_RIGHT_2: ENC_RIGHT.2 U_MAIN.68 | length 2474.6
  Top Layer w7: ENC_RIGHT.2 3848.71,1460 3871.39,1437.33 4245.27,1437.33 4327.94,1520 v1(4550,1520) ; U_MAIN.68 4340.75,2455.77 4410.02,2386.5 4446.44,2386.5 4515.44,2317.5 4580,2317.5 4592.5,2330 v1(4670,2330)
  Bottom Layer w7: v1(4550,1520) 4504.5,1565.5 4504.5,2052.04 4670,2217.54 v1(4670,2330)
NetJ_ESTOP_PHYS_1: J_ESTOP_PHYS.1 R_ESTOP_PHYS.1 U_MAIN.98 | length 2604.3
  Top Layer w7: J_ESTOP_PHYS.1 3140,4361.76 3326.18,4175.58 R_ESTOP_PHYS.1 3353.82,4175.58 3521.71,4007.69 3620.46,4007.69 3773.03,3855.12 3773.03,3653.03 v1(3730,3610) ; U_MAIN.98 4661,3072.64 4678.36,3090 v1(4690,3090)
  Bottom Layer w7: v1(3730,3610) 4170,3610 v1(4690,3090)
NetJ_ESTOP_WL_1: J_ESTOP_WL.1 R_ESTOP_WL.1 U_MAIN.99 | length 2184.4
  Top Layer w7: U_MAIN.99 4644.83,3092.32 4644.83,3099.27 4717.49,3171.94 4724.44,3171.94 5124.41,3571.9 5124.41,4246.5 5116.5,4254.41 5030.32,4254.41 4960.28,4184.37 4874.1,4184.37 4870,4188.47 R_ESTOP_WL.1 4883.82,4217.79 5080,4413.97 J_ESTOP_WL.1
NetJ_JTAG_3: J_JTAG.3 U_MAIN.134 | length 1900.4
  Top Layer w7: U_MAIN.134 3927.36,3703.75 3969.88,3746.26 3969.88,4095.42 3916.38,4148.91 3916.38,4498.07 3950.71,4532.39 4274.08,4532.39 4308.01,4566.32 4308.01,4589.69 4341.93,4623.62 4378.07,4623.62 4413.94,4587.74 4413.94,4526.06 J_JTAG.3
NetJ_JTAG_5: J_JTAG.5 U_MAIN.110 | length 1898.3
  Top Layer w7: J_JTAG.5 4360,4400 4360,4378 4276.64,4378 4276.64,4351 4399.38,4351 4399.38,4324 4277,4324 4277,4297 4360,4297 4360,4293.5 4360,3990 4441.49,3908.51 4555.54,3908.51 4577,3887.04 4577,3511.23 4461.59,3395.82 4461.59,3321.55 4427.53,3287.48 4411.45,3287.48 4400.08,3298.85 4400.08,3342.04 U_MAIN.110
NetJ_JTAG_7: J_JTAG.7 U_MAIN.105 | length 1896.5
  Top Layer w7: J_JTAG.7 4303.62,4523.62 4378.07,4523.62 4416.38,4485.3 4416.38,3995.54 4486.42,3925.51 4562.58,3925.51 4725.31,3762.77 4725.31,3196.85 4717.4,3188.94 4595.45,3188.94 4573.95,3210.43 U_MAIN.105
NetJ_JTAG_9: J_JTAG.9 U_MAIN.109 | length 1935.4
  Top Layer w7: J_JTAG.9 4160,4390 4160,4374.5 4077,4374.5 4077,4347.5 4260,4347.5 4260,4320.5 4089.49,4320.5 4089.49,4293.5 4160,4293.5 4160,4290 4160,4165.96 4434.45,3891.51 4548.49,3891.51 4560,3880 4560,3518.27 4419.49,3377.76 U_MAIN.109
NetJ_JTAG_11: J_JTAG.11 R_JTAG_1.1 | length 180
  Top Layer w7: R_JTAG_1.1 J_JTAG.11
NetJ_JTAG_13: J_JTAG.13 U_MAIN.133 | length 1896.4
  Top Layer w7: U_MAIN.133 3947.05,3648.62 3986.88,3688.45 3986.88,3890 3986.88,3920.5 4086.88,3920.5 4086.88,3947.5 3986.88,3947.5 3986.88,3974.5 4043,3974.5 4043,4001.5 3986.88,4001.5 3986.88,4028.5 4043,4028.5 4043,4055.5 3986.88,4055.5 3986.88,4082.5 4045,4082.5 4045,4109.5 3979.84,4109.5 3979.84,4136.5 4021.5,4136.5 4021.5,4163.5 3933.38,4163.5 3933.38,4190.5 3986.88,4190.5 3986.88,4220 3986.88,4449.44 3969.88,4466.44 3969.88,4470.12 J_JTAG.13
NetJ_JTAG_17: J_JTAG.17 R_JTAG_2.1 | length 180
  Top Layer w7: R_JTAG_2.1 J_JTAG.17
NetJ_JTAG_19: J_JTAG.19 R_JTAG_3.1 | length 180
  Top Layer w7: R_JTAG_3.1 J_JTAG.19
NetR0_1: R0.1 U_MAIN.138 | length 122.1
  Top Layer w7: R0.1 3830,3422.78 3848.62,3404.16 U_MAIN.138
NetR0_2: R0.2 SW0.2 | length 310.7
  Top Layer w7: SW0.2 3828.43,3511.57 R0.2
NetR1_1: R1.1 U_MAIN.48 | length 1547.7
  Top Layer w7: v1(3910,2390) 3910,2427.44 3946.77,2464.21 3946.77,2507.4 U_MAIN.48 ; v1(4220,3470) 4333.36,3583.36 R1.1
  Bottom Layer w7: v1(3910,2390) 4200,2680 4215.9,2680 4220,2684.1 v1(4220,3470)
NetR1_2: R1.2 SW1.2 | length 209
  Top Layer w7: R1.2 4386.64,3623.02 4408.43,3644.8 SW1.2
NetR2_1: R2.1 U_MAIN.32 | length 104.4
  Top Layer w7: R2.1 3584.95,2650.02 3594.17,2659.25 U_MAIN.32
NetR_CLK1_1: R_CLK1.1 U_MAIN.8 | length 131
  Top Layer w7: R_CLK1.1 3565.83,3163.83 3597.97,3131.69 U_MAIN.8
NetR_CLK2_1: R_CLK2.1 U_MAIN.9 | length 122.7
  Top Layer w7: R_CLK2.1 3575.88,3100 3587.89,3112.01 U_MAIN.9
NetR_CLK3_1: R_CLK3.1 U_MAIN.23 | length 168.4
  Top Layer w7: R_CLK3.1 3548.91,2862.37 3574.86,2836.42 U_MAIN.23
NetR_CLK4_1: R_CLK4.1 U_MAIN.24 | length 164.6
  Top Layer w7: R_CLK4.1 3553.52,2800 3570.25,2816.73 U_MAIN.24
NetS1_RIGHT_07: S1_RIGHT.07 U_MAIN.37 | length 1638.9
  Top Layer w7: S1_RIGHT.07 3080,3128.66 3080,2760 3450,2390 v1(3560,2390) ; v1(3560,2300) 3560,2300.87 3730.51,2471.38 U_MAIN.37
  Bottom Layer w7: v1(3560,2300) v1(3560,2390)
NetS1_RIGHT_08: S1_RIGHT.08 U_MAIN.36 | length 1698.8
  Top Layer w7: S1_RIGHT.08 2849.76,3280.16 2904.21,3280.16 2990,3194.37 2990,2740 3380,2350 3580,2350 3657.68,2427.68 U_MAIN.36
PB10: GPIO_1.2 U_MAIN.69 | length 1372.5
  Top Layer w7: GPIO_1.2 4467.13,1807.13 v1(4560,1900) ; U_MAIN.69 4360.71,2507.4 4360.71,2459.85 4384.72,2435.84 4421.15,2435.84 4522.48,2334.5 4572.96,2334.5 4585.46,2347 4602.55,2347 4624.05,2368.5 4709.86,2368.5 4718.36,2360 v1(4730,2360)
  Bottom Layer w7: v1(4560,1900) 4521.5,1938.5 4521.5,2045 4730,2253.5 v1(4730,2360)
PB11: GPIO_1.4 U_MAIN.70 | length 1705.6
  Top Layer w7: GPIO_1.4 4175,1777.6 4191.19,1761.41 4232.72,1761.41 4249.72,1744.41 4458.86,1744.41 4598.5,1884.05 4598.5,1931.5 v1(4560,1970) ; U_MAIN.70 4380.4,2507.4 4380.4,2464.21 4391.77,2452.84 4428.19,2452.84 4529.53,2351.5 4565.92,2351.5 4578.42,2364 4585.46,2364 4606.96,2385.5 4648.24,2385.5 4661.24,2398.5 4769.86,2398.5 4778.36,2390 v1(4790,2390)
  Bottom Layer w7: v1(4560,1970) 4560,2040 4680,2160 4750,2160 4790,2200 v1(4790,2390)
PE7: GPIO_1.1 U_MAIN.58 | length 1266.8
  Top Layer w7: 4089.61,2369.06 4071.5,2350.94 4071.5,2315.54 4070,2314.04 4070,2241.51 4071.5,2240.01 4071.5,2171.5 4024.81,2124.81 4024.81,1993.3 4024.5,1992.99 4024.5,1947.01 4024.81,1946.7 4024.81,1599.61 4042.68,1581.74 4107.32,1581.74 4112.57,1587 4188.53,1587 4217.28,1615.74 4258.81,1615.74 4275,1631.93 GPIO_1.1 ; 4089.61,2369.09 4136.64,2416.12 4136.64,2430.94 4143.9,2438.2 U_MAIN.58
PE8: GPIO_1.3 U_MAIN.59 | length 1161
  Top Layer w7: U_MAIN.59 4163.58,2433.84 4153.64,2423.9 4153.64,2362.58 4156.24,2359.98 4156.24,2326.82 4133.69,2304.27 4091.1,2304.27 4087,2300.17 4087,2248.55 4090,2245.55 4090,2127 4041.81,2078.81 4041.81,1986.26 4041.5,1985.95 4041.5,1954.05 4041.81,1953.74 4041.81,1606.65 4049.72,1598.74 4100.28,1598.74 4117.28,1615.74 4158.81,1615.74 4175,1631.93 GPIO_1.3
PE9: GPIO_1.5 U_MAIN.60 | length 908
  Top Layer w7: GPIO_1.5 4075,1690.98 4121.5,1737.48 4121.5,2135.95 4110,2147.45 4110,2265.51 4131.76,2287.27 4140.73,2287.27 4173.24,2319.78 4173.24,2367.02 4170.64,2369.62 4170.64,2416.86 4183.27,2429.49 U_MAIN.60
PE11: GPIO_1.7 U_MAIN.64 | length 1569.9
  Top Layer w7: GPIO_1.7 3975,1631.93 4007.81,1599.11 4007.81,1592.57 4035.64,1564.74 4114.36,1564.74 4119.62,1570 v1(4390,1570) ; U_MAIN.64 4262.01,2455.84 4382.35,2335.5 4412.99,2335.5 4447,2301.49 4447,2283 v1(4490,2240)
  Bottom Layer w7: v1(4390,1570) 4390,2009.67 4490,2109.67 v1(4490,2240)
PF14: GPIO_1.6 U_MAIN.54 | length 830.3
  Top Layer w7: v1(3943,2120) 3943,2121.49 3997.01,2175.5 4005.5,2175.5 4037.5,2207.5 4037.5,2225.93 4019,2244.43 4019,2270.01 4036,2287.01 4036,2328.12 4037.5,2329.62 4037.5,2365.03 4055.61,2383.14 4055.61,2433.7 4065.16,2443.24 U_MAIN.54 ; GPIO_1.6 4080,1812.13 v1(4080,1970)
  Bottom Layer w7: v1(3943,2120) 3943,2113.5 4080,1976.5 v1(4080,1970)
PF15: GPIO_1.8 U_MAIN.55 | length 766.3
  Top Layer w7: GPIO_1.8 3981.5,1813.63 3981.5,2135.95 4004.05,2158.5 4012.54,2158.5 4054.5,2200.46 4054.5,2232.97 4036,2251.47 4036,2262.97 4053,2279.97 4053,2321.08 4054.5,2322.58 4054.5,2357.98 4072.61,2376.1 4072.61,2426.65 4084.84,2438.88 U_MAIN.55
VCC: C1.2 C2.2 C2_22.2 C3.2 C3_22.2 C4.2 C5.2 C6.2 C7.2 C8.2 C47.2 CBAT.2 FB.1 GPIO_1.9 J_JTAG.1 J_JTAG.2 PWR_GND_1.1 PWR_GND_2.1 R_POWER.1 S1_LEFT.09 S1_RIGHT.09 SW0.1 SW1.1 U_MAIN.17 U_MAIN.30 U_MAIN.39 U_MAIN.52 U_MAIN.62 U_MAIN.72 U_MAIN.84 U_MAIN.108 U_MAIN.121 U_MAIN.131 U_MAIN.143 U_MAIN.144 | length 13946.6
  Top Layer w7: S1_RIGHT.09 2851.5,3201.42 2795.31,3201.42 2755.76,3240.97 2755.76,3396.35 2797.05,3437.64 3063.89,3437.64 3081.53,3420 v1(3360,3420) 3368.23,3411.77 3382.82,3411.77 3530,3264.59 CBAT.2 3589.06,3263.75 3635.7,3310.39 U_MAIN.143@3747.97,3310.39 ; PWR_GND_1.1 3230,4190 v1(3730,3690) SW0.1 ; FB.1 3346.87,2626.87 v1(3390,2670) 3436.87,2716.87 C3.2 3549.77,2716.87 3568.02,2698.62 U_MAIN.30 3657.96,2698.9 3701.15,2698.9 3712.52,2710.27 3712.52,2942.88 3701.15,2954.25 3657.96,2954.25 U_MAIN.17 3563.17,2954.53 3554.9,2946.25 C2.2 ; v1(3740,2110) 3740,1825.98 3875,1690.98 GPIO_1.9 ; U_MAIN.143@3750.48,3342.04 3750.48,3298.85 3761.84,3287.48 3982.32,3287.48 3986.42,3291.59 U_MAIN.131@3986.42,3306.2 ; U_MAIN.39 3769.88,2411.7 C4.2 3777.72,2404.71 3804.19,2378.23 3821.77,2378.23 v1(3830,2370) 3928.5,2271.5 3996.45,2271.5 4019,2294.05 4019,2370.57 4021.87,2373.44 4021.87,2392.23 4029.64,2400 C5.2 4025.79,2404.21 U_MAIN.52 ; U_MAIN.131 U_MAIN.131@3986.42,3306.2 ; C1.2@3986.42,3469.84 3986.94,3469.84 3994.87,3477.77 3994.87,3480.27 4004.37,3489.77 4071.94,3489.77 4183.27,3378.44 U_MAIN.121 4183.27,3306.2 4169.55,3292.48 4000.14,3292.48 U_MAIN.131@3986.42,3306.2 ; C7.2 v1(4300,2120) R_POWER.1 ; U_MAIN.62 4222.64,2407.36 C6.2 4230,2310 v1(4260,2280) ; U_MAIN.72 4432.32,2507.68 v1(4549.98,2390.02) 4610,2450 C2_22.2 ; U_MAIN.84 4647.05,2797.05 C8.2 v1(4730,2800) 4849.08,2800 5245.06,3195.98 5299.76,3195.98 S1_LEFT.09 ; U_MAIN.108 4565.51,3269.49 4607.05,3311.02 C47.2 4611.02,3310 v1(4680,3310) 4680,3299.8 4700,3279.8 C3_22.2 ; SW1.1 4510,3816.85 v1(4510,3690) ; J_JTAG.2 J_JTAG.1 4560,3952.12 4770,3742.12 ; v1(4770,3690) 4770,3742.12 ; PWR_GND_2.1 4770,3900 4770,3742.12
  Bottom Layer w7: v1(3360,3420) 3360,3380 3390,3350 ; v1(3730,3690) 3390,3350 ; v1(3740,2110) 3740,2220.82 3690,2270.82 3690,2370 ; 4117.49,2342.51 4180,2280 v1(4260,2280) 4300,2240 v1(4300,2120) 4390,2210 4390,2280 4440,2280 v1(4549.98,2390.02) 4610,2450 4710,2450 4730,2470 v1(4730,2800) 4730,3260 v1(4680,3310) 4680,3520 v1(4510,3690) v1(4770,3690) ; 4117.74,2342.77 4110.51,2350 3860.2,2350 3840.2,2370 v1(3830,2370) 3690,2370 ; 3390,3350 v1(3390,2670) 3690,2370
pads on no net: GPIO_1.MH1 GPIO_1.MH2 S1_LEFT. S1_LEFT.01 S1_LEFT.02 S1_LEFT.03 S1_LEFT.04 S1_LEFT.05 S1_LEFT.06 S1_LEFT.11 S1_LEFT.12 S1_LEFT.13 S1_LEFT.14 S1_LEFT.15 S1_LEFT.16 S1_LEFT.17 S1_LEFT.18 S1_LEFT.19 S1_LEFT.20 S1_LEFT.21 S1_LEFT.22 S1_LEFT.23 S1_LEFT.24 S1_LEFT.25 S1_LEFT.26 S1_LEFT.27 S1_LEFT.28 S1_LEFT.29 S1_LEFT.30 S1_RIGHT. S1_RIGHT.01 S1_RIGHT.02 S1_RIGHT.03 S1_RIGHT.04 S1_RIGHT.05 S1_RIGHT.06 S1_RIGHT.11 S1_RIGHT.12 S1_RIGHT.13 S1_RIGHT.14 S1_RIGHT.15 S1_RIGHT.16 S1_RIGHT.17 S1_RIGHT.18 S1_RIGHT.19 S1_RIGHT.20 S1_RIGHT.21 S1_RIGHT.22 S1_RIGHT.23 S1_RIGHT.24 S1_RIGHT.25 S1_RIGHT.26 S1_RIGHT.27 S1_RIGHT.28 S1_RIGHT.29 S1_RIGHT.30 U_MAIN.1 U_MAIN.2 U_MAIN.3 U_MAIN.4 U_MAIN.5 U_MAIN.7 U_MAIN.10 U_MAIN.11 U_MAIN.12 U_MAIN.13 U_MAIN.14 U_MAIN.15 U_MAIN.18 U_MAIN.19 U_MAIN.20 U_MAIN.21 U_MAIN.22 U_MAIN.26 U_MAIN.27 U_MAIN.28 U_MAIN.29 U_MAIN.34 U_MAIN.35 U_MAIN.40 U_MAIN.41 U_MAIN.42 U_MAIN.43 U_MAIN.44 U_MAIN.45 U_MAIN.46 U_MAIN.47 U_MAIN.49 U_MAIN.50 U_MAIN.53 U_MAIN.56 U_MAIN.57 U_MAIN.66 U_MAIN.73 U_MAIN.74 U_MAIN.75 U_MAIN.76 U_MAIN.77 U_MAIN.78 U_MAIN.79 U_MAIN.80 U_MAIN.81 U_MAIN.82 U_MAIN.85 U_MAIN.86 U_MAIN.87 U_MAIN.88 U_MAIN.89 U_MAIN.90 U_MAIN.91 U_MAIN.92 U_MAIN.93 U_MAIN.94 U_MAIN.100 U_MAIN.101 U_MAIN.102 U_MAIN.103 U_MAIN.104 U_MAIN.111 U_MAIN.112 U_MAIN.113 U_MAIN.114 U_MAIN.115 U_MAIN.116 U_MAIN.117 U_MAIN.118 U_MAIN.119 U_MAIN.122 U_MAIN.123 U_MAIN.124 U_MAIN.125 U_MAIN.126 U_MAIN.127 U_MAIN.128 U_MAIN.129 U_MAIN.132 U_MAIN.135 U_MAIN.136 U_MAIN.137 U_MAIN.139 U_MAIN.140 U_MAIN.141 U_MAIN.142

## Polygon pours and split planes (outlines as drawn)
GND on Bottom Layer "GND_L02_P001" (solid, pour order 1): 2980,4650 5160,4650 5170,4640 5170,1130 2980,1130

## Other copper
Bottom Layer:
  pour cut-out: 3300,3740 3300,2030 4790,2030 4790,3740
  pour cut-out: 3950,2030 3950,1890 3660,1600 3660,1510 4610,1510 4610,2030
  pour cut-out: 3660,1510 3940,1230 4330,1230 4610,1510

## Silkscreen, mask and mechanical layers (free items; w line width, h text height)
Top Overlay:
  drawing of 17 lines, arcs and shapes, not listed
  text "University of Michigan / College of Engineering /  / Autonomous Robotic / Vehicle (ARV)" at 3610.2,4720 h40

## Dimensions
2660,2050 to 5470,2072.88 on Top Overlay
3000,1050 to 3400,5140 on Top Overlay